# EAGLE board pickr bot for mil (EAGLE 9.6.2)
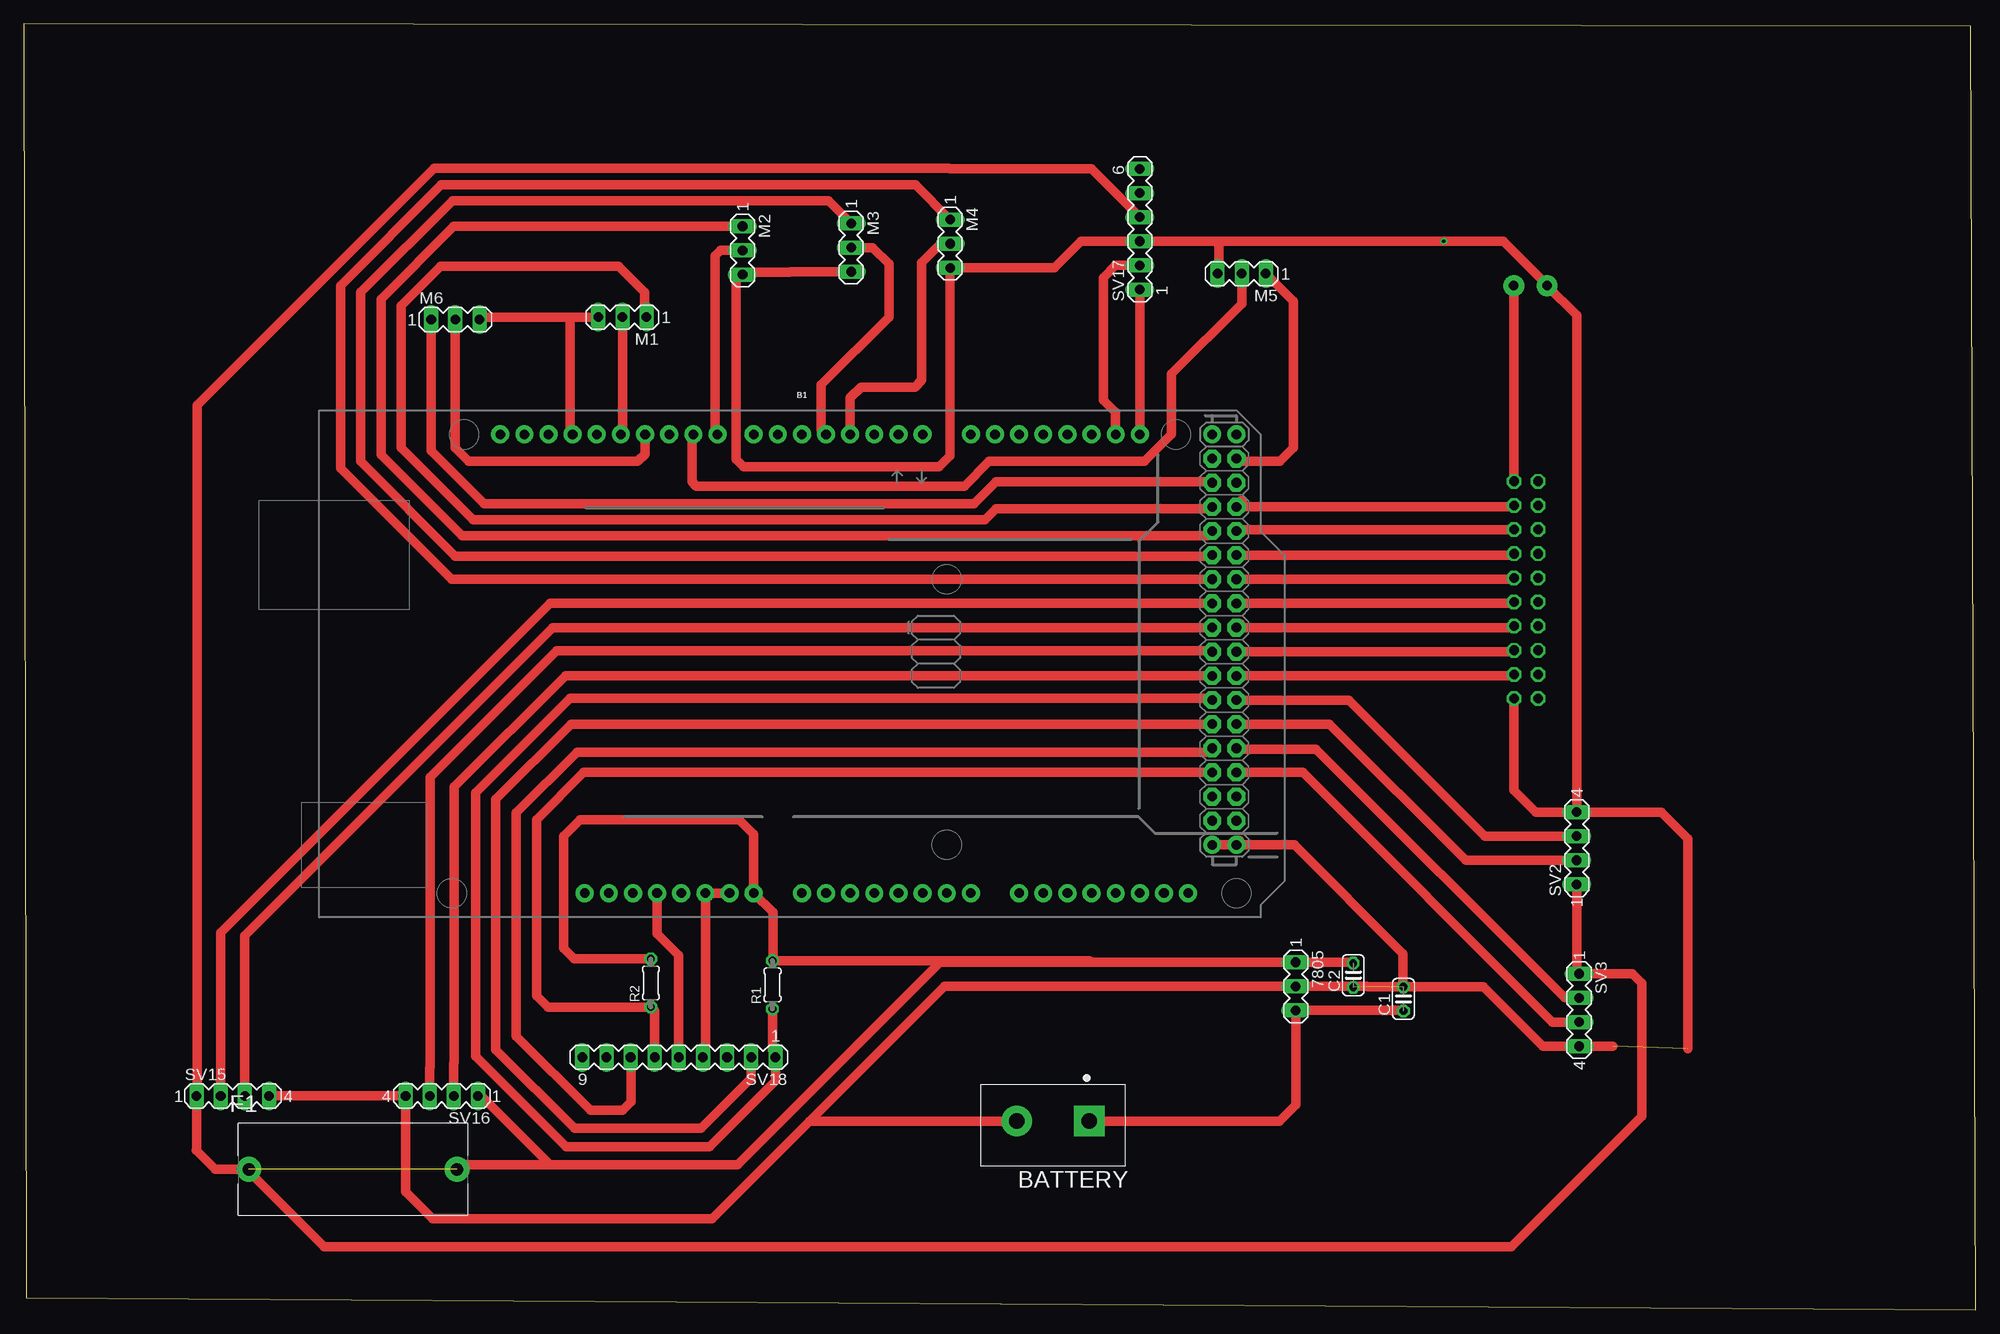
[diagram p0: board, top side]
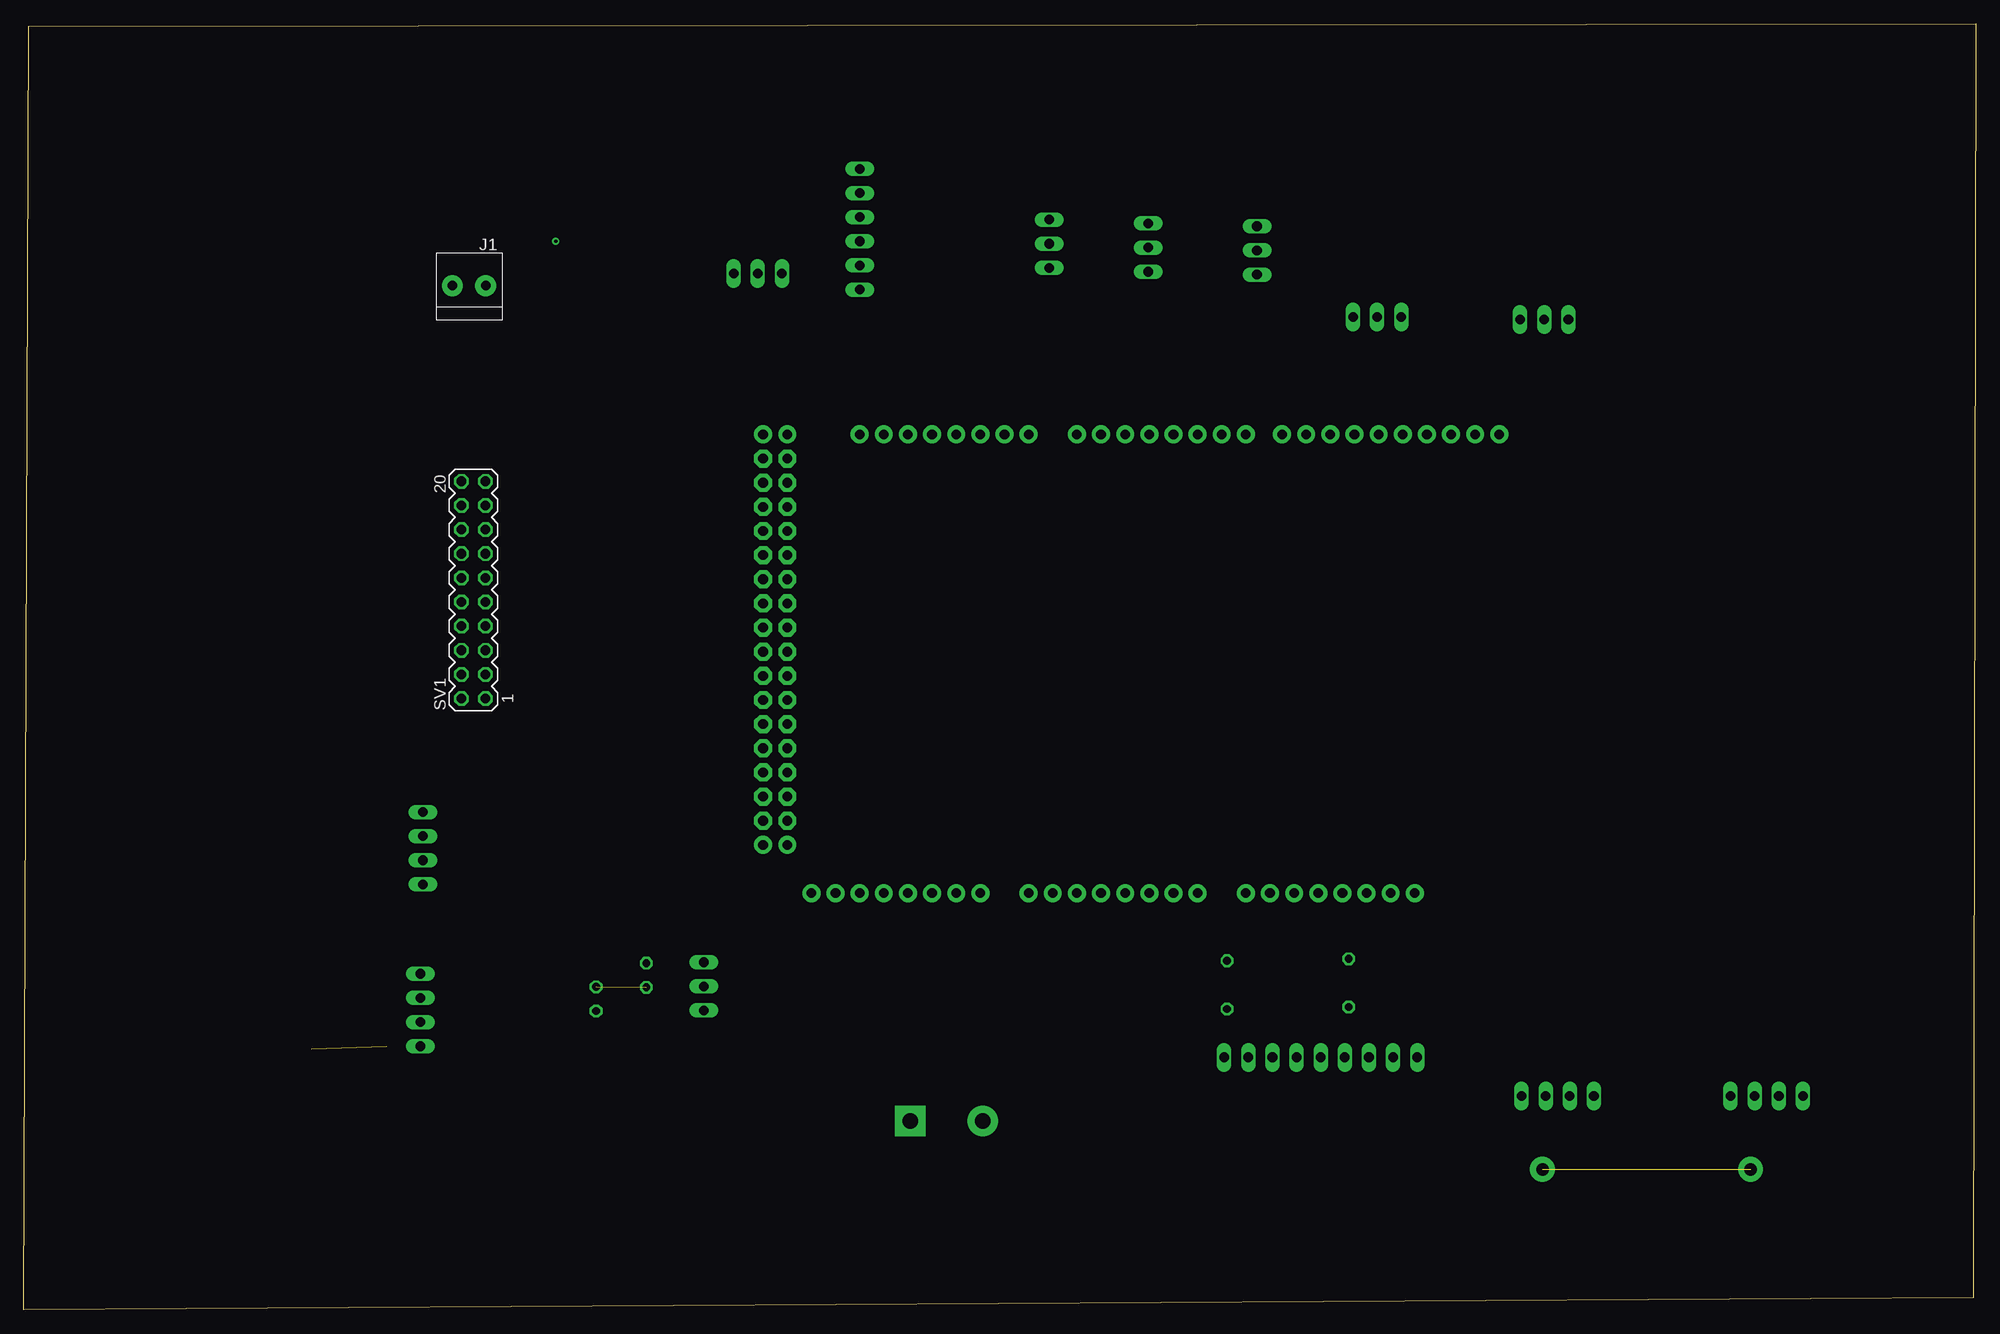
[diagram p1: board, bottom side, seen from below]

Size 205.42 x 135.31 mm. Coordinates in mm from the lower left corner, seen from the top.
Outline: 0.25,1.27 205.42,0 204.91,135.05 0,135.31 0.25,1.27
Copper layers (1*16): Top 0.035mm / dielectric 1.5mm / Bottom 0.035mm
Design rules "default": minimum track width 6mil, minimum drill 0.35mm, track to track 6mil, track to pad 6mil, pad to pad 6mil, via to via 6mil, smd to smd 6mil, copper to edge 40mil, drill to drill 6mil, minimum pad ring 10mil, minimum via ring 8mil, stop-mask expansion 4mil, vias tented up to drill 0mil, thermal gap 10mil

## Footprints (pad centres in the part's own frame; a part is rotated, then mirrored left to right if it is on the bottom)
MA03-1 = drill 1.016 long: 1 -2.54,0; 2 0,0; 3 2.54,0
ARDUINO_MEGA_NO_SILK = drill 1.016 pad 1.88: 0 13.97,24.13; 1 11.43,24.13; 2 8.89,24.13; 3 6.35,24.13; 3.3V -13.97,-24.13; 4 3.81,24.13; 5 1.27,24.13; 5V -11.43,-24.13; 5V@1 44.45,24.13; 5V@2 46.99,24.13; 6 -1.27,24.13; 7 -3.81,24.13; 8 -7.62,24.13; 9 -10.16,24.13; 10 -12.7,24.13; 11 -15.24,24.13; 12 -17.78,24.13; 13 -20.32,24.13; 14 19.05,24.13; 15 21.59,24.13; 16 24.13,24.13; 17 26.67,24.13; 18 29.21,24.13; 19 31.75,24.13; 20 34.29,24.13; 21 36.83,24.13; A0 1.27,-24.13; A1 3.81,-24.13; A2 6.35,-24.13; A3 8.89,-24.13; A4 11.43,-24.13; A5 13.97,-24.13; A6 16.51,-24.13; A7 19.05,-24.13; A8 24.13,-24.13; A9 26.67,-24.13; A10 29.21,-24.13; A11 31.75,-24.13; A12 34.29,-24.13; A13 36.83,-24.13; A14 39.37,-24.13; A15 41.91,-24.13; AREF -25.4,24.13; GND -8.89,-24.13; GND@1 -6.35,-24.13; GND@2 44.45,-19.05; GND@3 46.99,-19.05; GND@4 -22.86,24.13; IOREF -19.05,-24.13; NC -21.59,-24.13; RESET -16.51,-24.13; SCL -30.48,24.13; SDA -27.94,24.13; VIN -3.81,-24.13 | drill 1.016 pad 1.88 octagon: 22 44.45,21.59; 23 46.99,21.59; 24 44.45,19.05; 25 46.99,19.05; 26 44.45,16.51; 27 46.99,16.51; 28 44.45,13.97; 29 46.99,13.97; 30 44.45,11.43; 31 46.99,11.43; 32 44.45,8.89; 33 46.99,8.89; 34 44.45,6.35; 35 46.99,6.35; 36 44.45,3.81; 37 46.99,3.81; 38 44.45,1.27; 39 46.99,1.27; 40 44.45,-1.27; 41 46.99,-1.27; 42 44.45,-3.81; 43 46.99,-3.81; 44 44.45,-6.35; 45 46.99,-6.35; 46 44.45,-8.89; 47 46.99,-8.89; 48 44.45,-11.43; 49 46.99,-11.43; 50 44.45,-13.97; 51 46.99,-13.97; 52 44.45,-16.51; 53 46.99,-16.51
TERMINALBLOCK_PLUGGABLE-2-7.62MM = drill 1.6 pad 3.2 square: 1 -3.81,0 | drill 1.6 pad 3.2: 2 3.81,0
C025-024X044 = drill 0.813 octagon: 1 -1.27,0; 2 1.27,0
4527 = drill 1.3 pad 2.6: 1 -10.95,0; 2 10.95,0
1X2-3.5MM = drill 1 pad 2.184: 1 1.8,0; 2 -1.7,0
0204/5 = drill 0.813 octagon: 1 -2.54,0; 2 2.54,0
MA10-2 = drill 1.016 octagon: 1 -11.43,-1.27; 2 -11.43,1.27; 3 -8.89,-1.27; 4 -8.89,1.27; 5 -6.35,-1.27; 6 -6.35,1.27; 7 -3.81,-1.27; 8 -3.81,1.27; 9 -1.27,-1.27; 10 -1.27,1.27; 11 1.27,-1.27; 12 1.27,1.27; 13 3.81,-1.27; 14 3.81,1.27; 15 6.35,-1.27; 16 6.35,1.27; 17 8.89,-1.27; 18 8.89,1.27; 19 11.43,-1.27; 20 11.43,1.27
MA04-1 = drill 1.016 long: 1 -3.81,0; 2 -1.27,0; 3 1.27,0; 4 3.81,0
MA06-1 = drill 1.016 long: 1 -6.35,0; 2 -3.81,0; 3 -1.27,0; 4 1.27,0; 5 3.81,0; 6 6.35,0
MA09-1 = drill 1.016 long: 1 -10.16,0; 2 -7.62,0; 3 -5.08,0; 4 -2.54,0; 5 0,0; 6 2.54,0; 7 5.08,0; 8 7.62,0; 9 10.16,0

## Placement (x,y rotation side)
7805  [MA03-1]  133.86,34.04 270 top
B1  ARDUINO_MEGA_R3FULL  [ARDUINO_MEGA_NO_SILK]  80.62,67.97 0 top
BATTERY  691311400102  [TERMINALBLOCK_PLUGGABLE-2-7.62MM]  108.31,19.86 180 top
C1  [C025-024X044]  145.19,32.72 90 top
C2  [C025-024X044]  139.9,35.2 90 top
F1  4527  [4527]  34.65,14.78 0 top
J1  1X2-3.5MM  [1X2-3.5MM]  158.6,107.75 0 bottom
M1  [MA03-1]  62.99,104.44 180 top
M2  [MA03-1]  75.64,111.46 270 top
M3  [MA03-1]  87.07,111.76 270 top
M4  [MA03-1]  97.49,112.17 270 top
M5  [MA03-1]  128.17,109.02 180 top
M6  [MA03-1]  45.42,104.19 0 top
R1  [0204/5]  78.79,34.19 90 top
R2  [0204/5]  65.99,34.39 90 top
SV1  [MA10-2]  158.09,75.74 90 bottom
SV2  [MA04-1]  163.42,48.56 90 top
SV3  [MA04-1]  163.68,31.55 270 top
SV15  [MA04-1]  22,22.5 0 top
SV16  [MA04-1]  43.99,22.5 180 top
SV17  [MA06-1]  117.45,113.69 90 top
SV18  [MA09-1]  68.94,26.57 180 top

## Library data of the parts
7805 M1-M6 SV1-SV3 SV15-SV18 = con-lstb; OC_FARNELL: unknown; OC_NEWARK: unknown
B1 = SparkFun-Boards
BATTERY = Terminal Blocks; CREATED_BY: PCBLayout.com; DIGIKEY_PART_NO: 732-2823-ND; MANUFACTURER: WURTH ELEKTRONIK; MPN: 691311400102
C1 C2 = resistor (2); SPICEPREFIX: C
F1 = Fuse Holder; CREATED_BY: PCBLayout.com; DIGIKEY_PN: 36-4527-ND; MANUFACTURER: Keystone Electronics; MPN: 4527
J1 = adafruit
R1 R2 = resistor (2)

## Nets
3.3: B1.3.3V SV18.5
43: B1.43 SV2.3
45: B1.45 SV2.2
47: B1.47 SV3.2
49: B1.49 SV3.3
A: B1.48 R2.1 SV18.6
C: B1.44 SV18.2
CL: B1.46 SV18.7
D: B1.42 R1.1 SV18.1
D1: B1.26 M1.1
D2: B1.28 M2.1
D3: B1.30 M3.1
D4: B1.32 M4.1
D5: B1.23 M5.1
D6: B1.24 M6.1
E1: B1.36 SV15.3
E2: B1.38 SV16.3
FVDF: B1.22
G: 7805.2 B1.GND B1.GND@1 B1.GND@2 B1.GND@3 B1.GND@4 BATTERY.2 C1.2 C2.1 J1.2 M1.3 M2.3 M3.3 M4.3 M5.3 M6.3 SV1.1 SV2.4 SV3.4 SV15.4 SV16.4 SV17.3 SV18.4
G2: B1.27 SV1.17
G3: B1.29 SV1.15
G4: B1.31 SV1.13
G5: B1.33 SV1.11
G6: B1.35 SV1.9
G7: B1.37 SV1.7
G8: B1.39 SV1.5
GHFGH: B1.7
H1: B1.20 SV17.2
H2: B1.21 SV17.1
N$96: B1.10
N$100: B1.6
N$101: B1.5
N$122: B1.41 SV1.3
P1: B1.12 M1.2
P2: B1.8 M2.2
P3: B1.4 M3.2
P4: B1.3 M4.2
P5: B1.9 M5.2
P6: B1.11 M6.2
PO: J1.1 SV1.19
T1: B1.34 SV15.2
T2: B1.40 SV16.2
V: 7805.1 B1.VIN C2.2 F1.1 F1.2 R1.2 R2.2 SV2.1 SV3.1 SV15.1 SV16.1 SV17.4
VB: 7805.3 BATTERY.1 C1.1

## Tracks (layer width: path | path; a pad name or v marks a point on that pad's centre or on a via)
3.3
  Top 1.016: SV18.5 68.94,37.29 66.65,39.57 B1.3.3V
43
  Top 1.016: SV2.3 153.77,49.83 139.45,64.16 B1.43
45
  Top 1.016: SV2.2 151.74,47.29 137.41,61.62 B1.45
47
  Top 1.016: SV3.2 162.15,32.82 135.99,58.98 127.71,58.98 B1.47
49
  Top 1.016: SV3.3 160.88,30.28 134.62,56.54 B1.49
A
  Top 1.016: 66.4,27.74 SV18.6 66.4,31.44 R2.1 55.17,31.85 53.95,33.07 53.95,51.56 58.93,56.54 B1.48
C
  Top 1.016: SV18.2 76.56,24.38 71.27,19.1 57.96,19.1 49.68,27.38 49.68,53.7 57.61,61.62 B1.44
CL
  Top 1.016: SV18.7 63.86,27.43 | B1.46 124.66,58.67 58.22,58.67 51.82,52.27 51.82,28.8 59.64,20.98 62.99,20.98 63.91,21.89 63.91,26.52 SV18.7 | SV18.7 63.86,25.86
D
  Top 1.016: B1.42 124.87,64.36 57.51,64.36 47.55,54.41 47.55,26.67 57.05,17.17 72.19,17.17 79.1,24.08 SV18.1 78.89,26.77 78.79,27.38 R1.1
D1
  Top 1.016: M1.1 65.33,104.65 65.33,107.04 62.59,109.78 43.89,109.78 39.73,105.61 39.73,90.68 47.29,83.11 101.14,83.11 102.31,84.28 124.87,84.28 B1.26
D2
  Top 1.016: M2.1 45.26,113.99 37.59,106.32 37.59,89.97 46.13,81.43 124.56,81.43 B1.28
D3
  Top 1.016: M3.1 84.68,116.69 45.11,116.69 35.46,107.04 35.46,89.26 45.42,79.3 124.97,79.3 B1.30
D4
  Top 1.016: M4.1 93.83,118.36 43.94,118.36 33.32,107.75 33.32,88.54 45.01,76.86 B1.32
D5
  Top 1.016: M5.1 133.6,106.12 133.6,90.68 132.18,89.26 127.91,89.26 B1.23
D6
  Top 1.016: M6.1 42.88,90.37 48.46,84.78 99.97,84.78 102.31,87.12 124.97,87.12 B1.24
E1
  Top 1.016: B1.36 55.68,71.78 23.27,39.37 SV15.3
E2
  Top 1.016: B1.38 124.97,69.34 56.08,69.34 42.77,56.03 42.77,25.5 42.72,25.45 SV16.3
G  (via drill 0.35)  (2 unrouted)
  Top 1.016: M1.3 57.76,104.44 | 57.76,104.44 57.51,104.19 57.51,92.35 B1.GND@4 | M3.3 80.68,109.22 80.57,109.17 75.9,109.17 M2.3 74.96,108.23 74.96,89.51 75.74,88.72 96.34,88.72 97.49,89.86 M4.3 108.46,109.63 111.25,112.42 SV17.3 125.37,112.42 | M6.3 48.21,104.44 57.76,104.44 | SV18.4 71.73,26.82 B1.GND B1.GND@1 | 125.37,112.42 125.78,112.01 125.78,109.17 M5.3 | 133.45,34.19 133.3,34.04 | B1.GND@3 127.46,48.77 127.3,48.92 B1.GND@2 133.71,48.92 145.14,37.49 145.14,34.04 C1.2 | B1.GND@3 127.91,49.22 127.91,49.43 127.61,49.12 B1.GND@3 | 133.3,34.04 7805.2 141.33,34.04 141.38,33.98 C1.2 | 82.7,19.86 72.44,9.6 43.03,9.6 40.18,12.45 SV16.4 SV15.4 | 82.7,19.86 96.88,34.04 133.3,34.04 | 82.7,19.86 BATTERY.2 | 125.37,112.42 v149.43,112.42 155.7,112.42 160.34,107.79 J1.2 163.42,104.62 SV2.4 | SV1.1 156.82,54.66 159.11,52.37 SV2.4 | C1.2 153.62,33.98 159.87,27.74 SV3.4 167.23,27.74 | SV2.4 172.31,52.37 175.11,49.58 175.11,27.48
G2
  Top 1.016: B1.27 156.67,84.48 SV1.17
  Top 1.27: B1.27 128.12,84.99
G3
  Top 1.016: SV1.15 127.76,82.09 B1.29
G4
  Top 1.016: B1.31 156.67,79.4 SV1.13
G5
  Top 1.016: SV1.11 156.67,76.86 B1.33
G6
  Top 1.016: B1.35 156.67,74.32 SV1.9
G7
  Top 1.016: 128.02,72.19 B1.37 156.67,71.78 SV1.7
G8
  Top 1.016: 127.71,69.34 B1.39 156.67,69.24 SV1.5
H1
  Top 1.016: SV17.2 114.91,109.88 113.64,108.61 113.64,95.71 114.91,94.44 B1.20
H2
  Top 1.016: SV17.1 B1.21
N$122
  Top 1.016: SV1.3 156.67,66.7 B1.41
P1
  Top 1.016: M1.2 62.99,92.25 B1.12
P2
  Top 1.016: M2.2 73.3,111.45 72.75,110.9 72.75,92.35 B1.8
P3
  Top 1.016: 84.06,92.47 B1.4 83.92,92.61 83.92,97.33 91.03,104.44 91.03,110.03 89.31,111.76 M3.2
P4
  Top 1.016: M4.2 96.47,112.17 94.49,110.18 94.49,97.79 93.78,97.08 88.09,97.08 86.97,95.96 B1.3
P5
  Top 1.016: M5.2 128.17,105.87 120.8,98.5 120.8,92.1 117.96,89.26 101.6,89.26 99.01,86.66 70.76,86.66 70.31,87.12 70.31,91.95 B1.9
P6
  Top 1.016: M6.2 45.42,90.68 46.84,89.26 64.62,89.26 65.38,90.02 B1.11
PO  (via drill 0.35)
  Top 1.016: SV1.19 v156.84,87.19 156.8,87.24 J1.1
T1
  Top 1.016: B1.34 55.37,74.32 20.73,39.67 SV15.2
T2
  Top 1.016: B1.40 57,66.7 45.31,55.02 45.31,26.01 45.26,25.96 SV16.2
V  (1 unrouted)
  Top 1.016: 76.71,43.94 B1.VIN | R2.2 57.91,36.93 56.79,38.05 56.79,49.83 58.52,51.56 75.29,51.56 76.81,50.04 B1.VIN | SV17.4 112.37,120.04 97.43,120.04 97.38,120.09 43.18,120.09 18.24,95.15 18.24,22.55 SV15.1 18.19,16.87 18.14,16.81 20.17,14.78 F1.1 23.7,14.56 31.6,6.65 156.57,6.65 170.28,20.37 170.28,34.34 169.27,35.36 SV3.1 163.42,35.61 SV2.1 | 7805.1 139.8,36.58 C2.2 | SV16.1 47.98,22.68 55.37,15.29 | 55.37,15.29 75.13,15.29 96.42,36.58 7805.1 | B1.VIN 78.84,41.81 78.84,36.78 R1.2 112.17,36.73 112.32,36.58 7805.1 | F1.2 46.1,15.29 55.37,15.29
VB
  Top 1.016: C1.1 145.14,31.5 7805.3 133.86,21.59 132.13,19.86 BATTERY.1